# Altium PCB PCB1.PcbDoc
Units mm, origin at the board's own origin, x right, y up, seen from the top; angles counter-clockwise.
Board outline 66.08 x 52.76 mm, 2 copper layers (Top Layer, Bottom Layer); 20 components, 12 nets, 44 pads, 0 vias.
Unrouted connection lines stored in the file: 1.
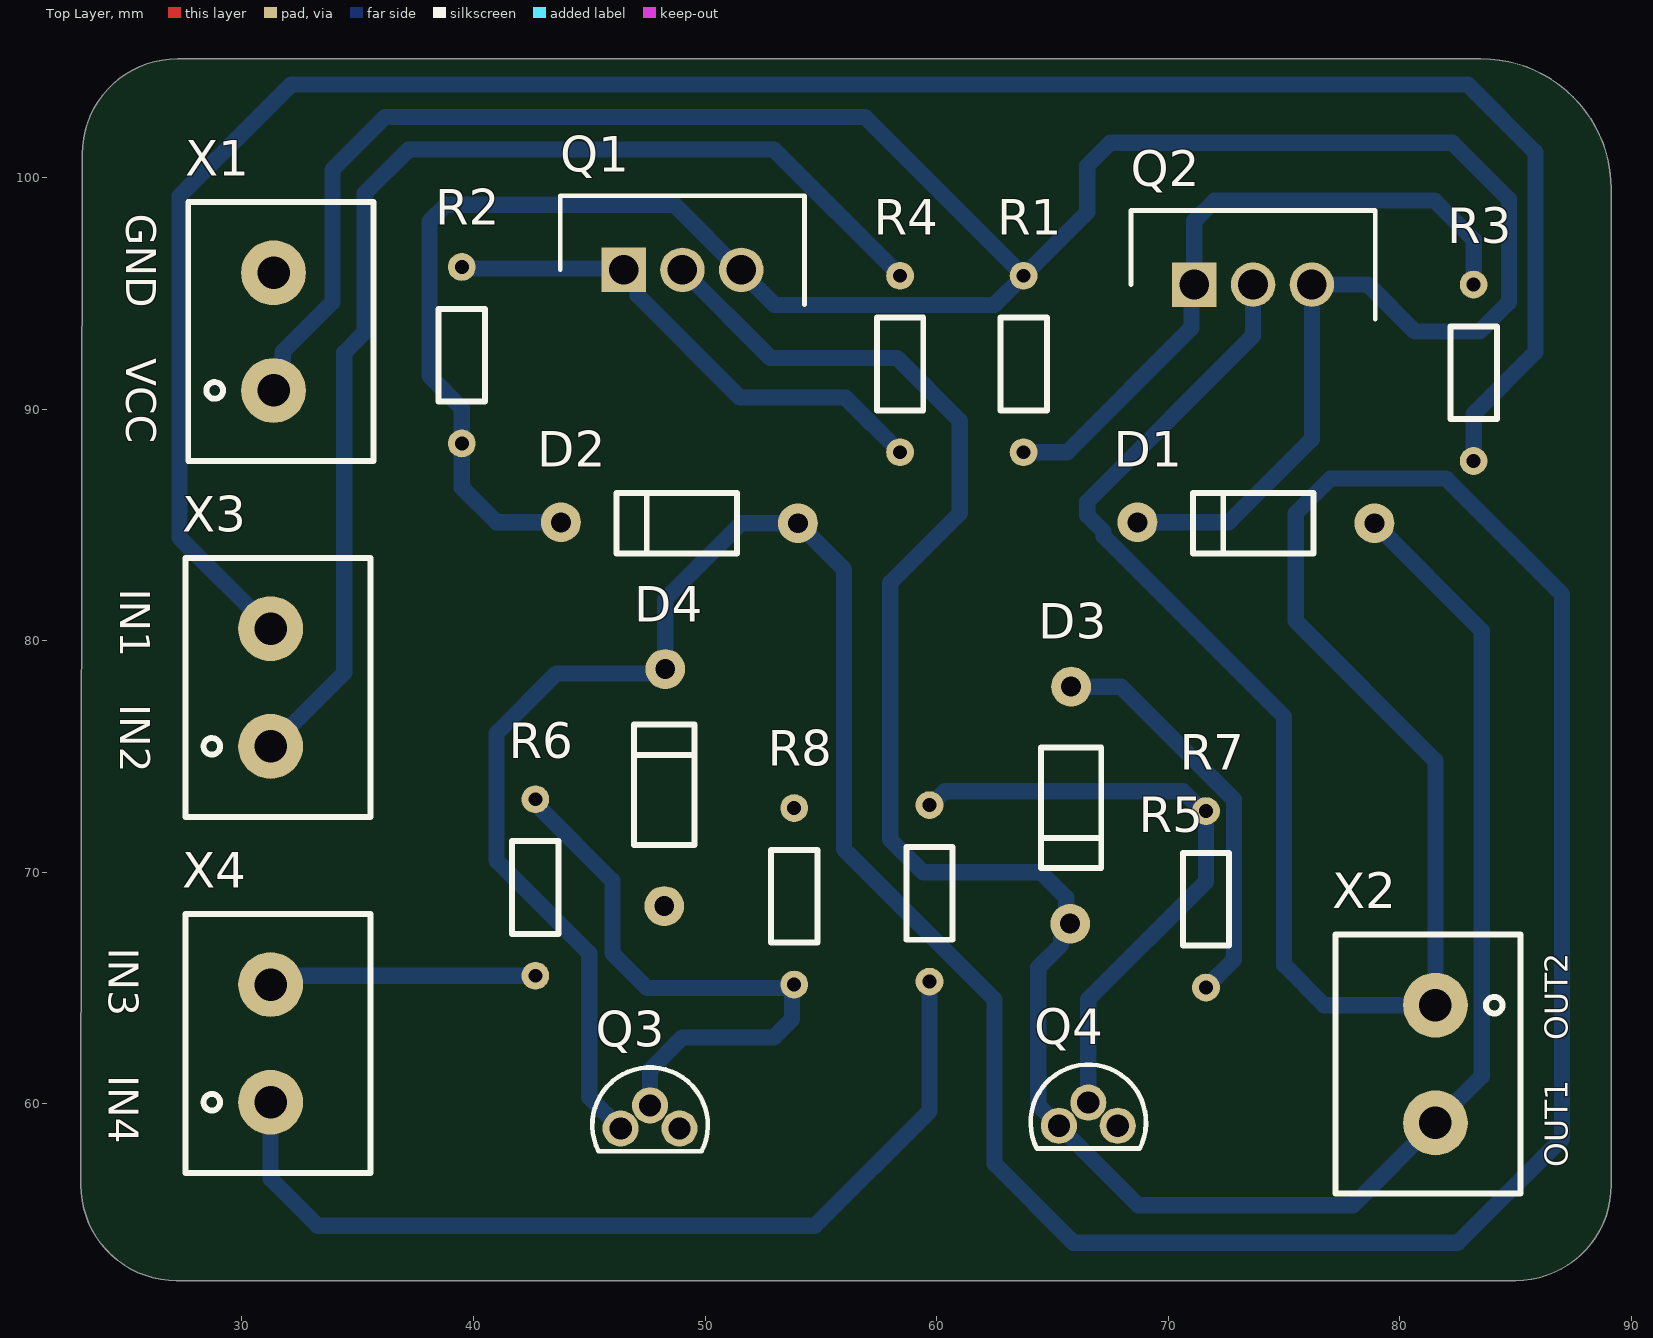
[diagram p0: Top Layer view]
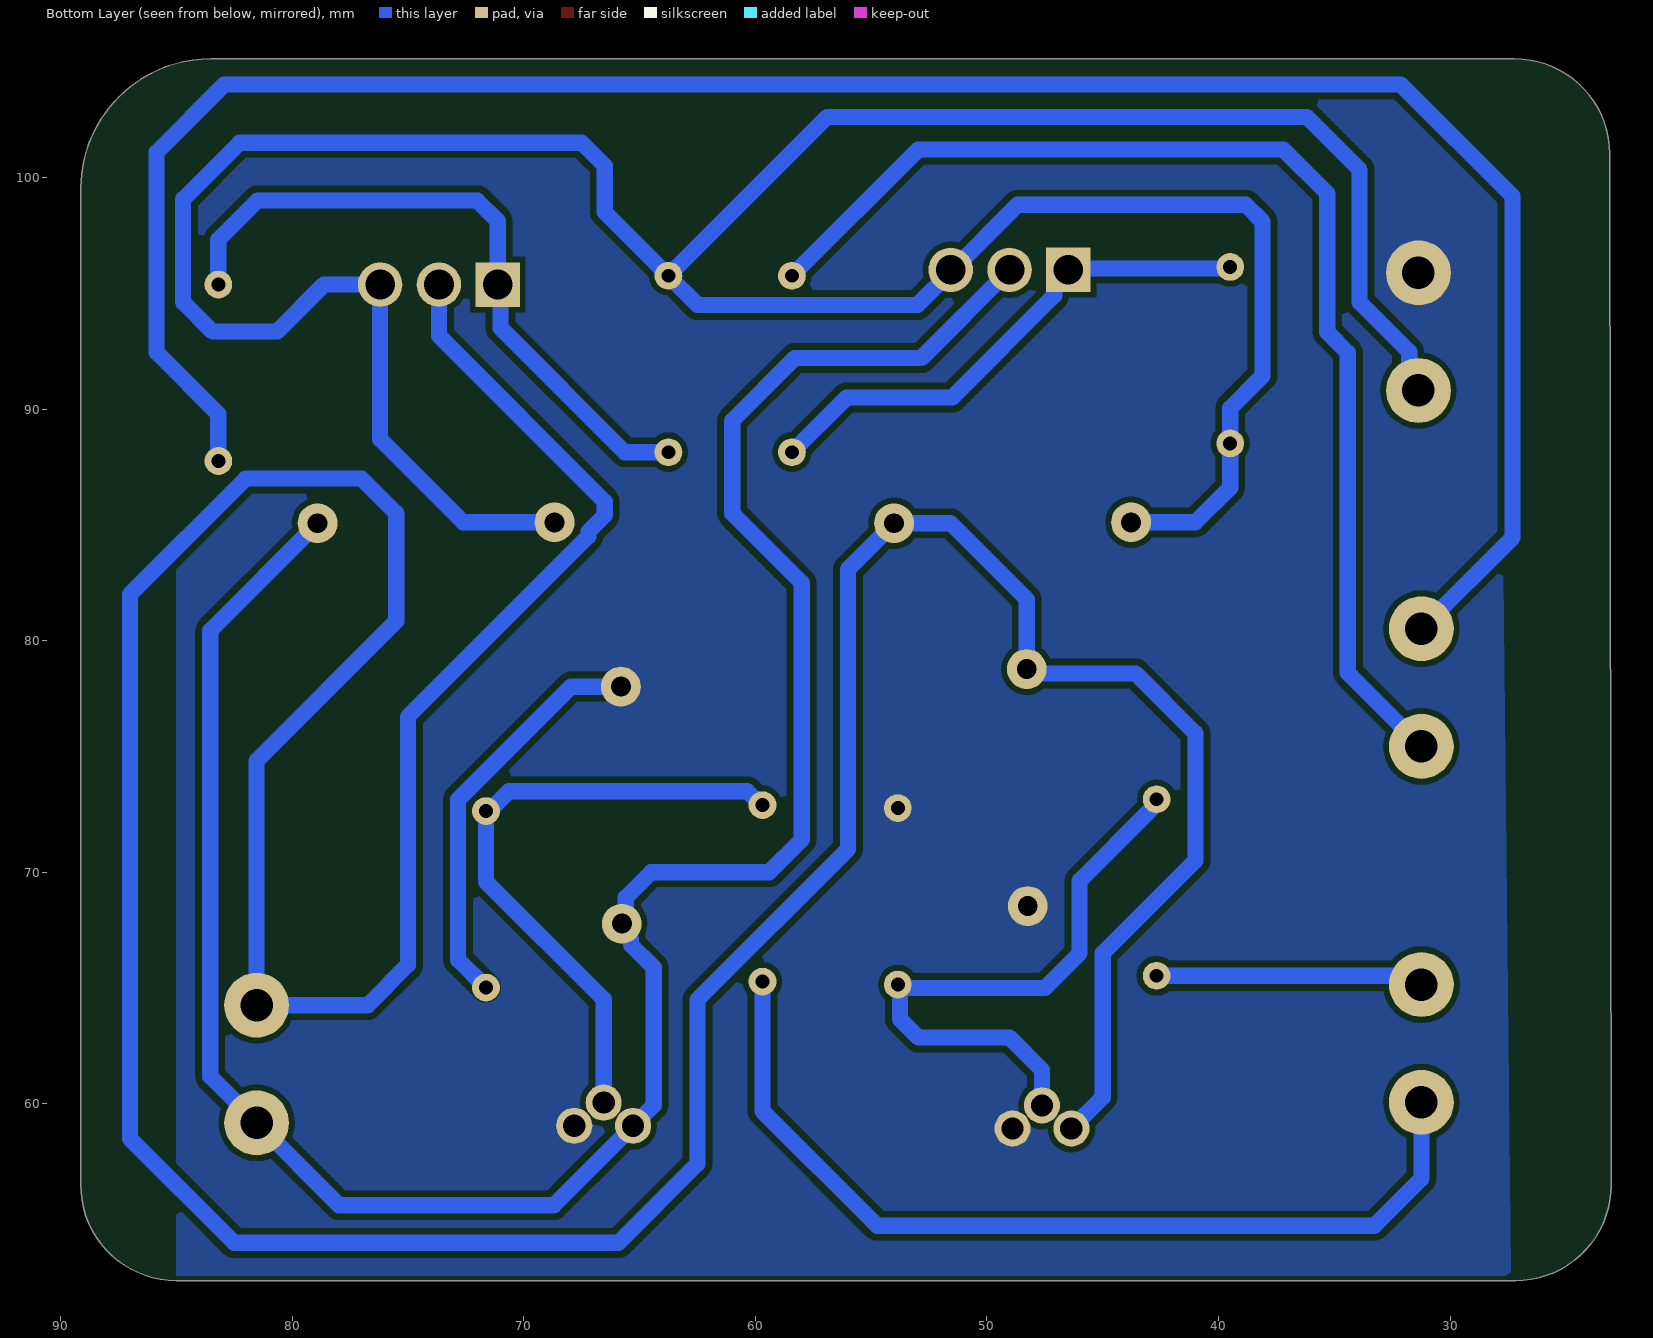
[diagram p1: Bottom Layer view, seen from below]
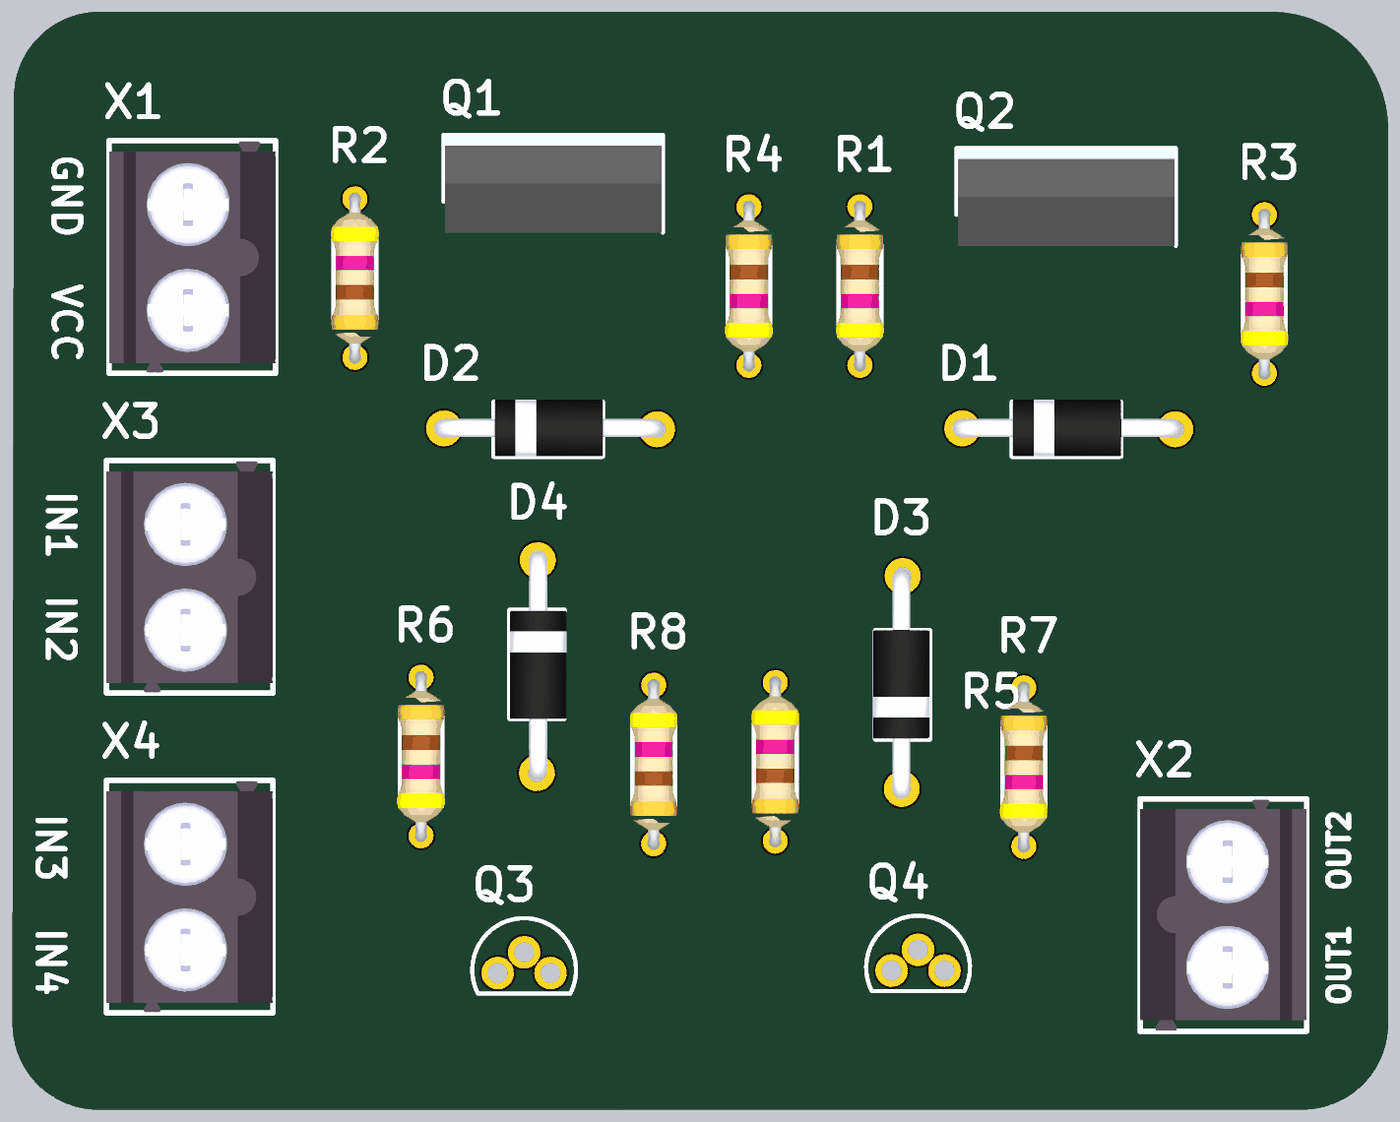
[diagram p2: 3D render of the assembled board from above, using the file's embedded part models]

## Layer stack, top to bottom
Top Solder: solder mask 0.0102, Solder Resist, Dk 3.5
Top Layer: signal copper 0.0356
Dielectric 1: dielectric 0.32, FR-4, Dk 4.8
Bottom Layer: signal copper 0.0356
Bottom Solder: solder mask 0.0102, Solder Resist, Dk 3.5

## Board outline
27.179,52.37 cw(c27.179,56.5) 23.049,56.496 23.043,56.535 23.113,101.014 cw(c27.227,101.013) 27.227,105.127 83.5,105.127 cw(c83.5,99.5) 89.127,99.5 89.127,56.501 89.127,56.5 cw(c85,56.5) 85,52.373 84.997,52.373

## Design rules (kind name [scope] priority, off if disabled: settings)
Clearance [All] p1: gap=0.254 ignorepadtopadclearanceinfootprint=FALSE except(0.3: Track-Track Track-Poly)
PolygonConnect PolygonConnect_1 [All vs IsNamedPolygon('GND_L02_P000')] p1: connectstyle=Direct reliefconductorwidth=0.254 reliefentries=4 polygonreliefangle="90 Angle" airgapwidth=0.254
PolygonConnect [All] p2: connectstyle=Relief reliefconductorwidth=0.254 reliefentries=4 polygonreliefangle="90 Angle" airgapwidth=0.254
RoutingVias [All] p1: holewidth=0.711 width=1.27 viastyle="Through Hole" minholewidth=0.711 minwidth=1.27 maxholewidth=0.711 maxwidth=1.27
SolderMaskExpansion [All] p1: expansion=0.102 istentingtop=FALSE
SupplyNets "Schematic Supply Nets_1" [InNet('VCC')] p1: voltage=0.000
SupplyNets "Schematic Supply Nets" [InNet('GND')] p2: voltage=0.000
Width [All] p1: maxlimit=1 minlimit=0.254 preferedwidth=0.7
30 further rules are at their usual default settings.

## Components (designator, comment, footprint, x,y, rotation, side; value= is the part's Value field where it differs from the comment)
D1 "Diode" "Diode DO_41" 73.787,85.09 r180 top
D2 "Diode" "Diode DO_41" 48.895,85.09 r180 top
D3 "Diode" "Diode DO_41" 65.786,72.898 r270 top
D4 "Diode" "Diode DO_41" 48.26,73.66 r90 top
Q1 "IRF9Z24NPBF" TO254P469X1042X1967-3P 46.482,96.012 r0 top
Q2 "IRF9Z24NPBF" TO254P469X1042X1967-3P 71.12,95.377 r0 top
Q3 "BS170_D26Z" TO-92_FAIRCHILD 47.625,59.436 r0 top
Q4 "BS170_D26Z" TO-92_FAIRCHILD 66.548,59.555 r0 top
R1 "100k" "Resistor THT" 63.754,91.948 r90 top
R2 "100k" "Resistor THT" 39.497,92.329 r270 top
R3 "100R" "Resistor THT" 83.185,91.567 r90 top
R4 "100R" "Resistor THT" 58.42,91.948 r90 top
R5 "100R" "Resistor THT" 59.69,69.088 r270 top
R6 "100R" "Resistor THT" 42.672,69.342 r90 top
R7 "100k" "Resistor THT" 71.628,68.834 r90 top
R8 "100k" "Resistor THT" 53.848,68.961 r270 top
X1 "TERM BLK 2P" "TERM BLK 2P" 31.369,93.345 r90 top
X2 "TERM BLK 2P" "TERM BLK 2P" 81.534,61.722 r270 top
X3 "TERM BLK 2P" "TERM BLK 2P" 31.242,77.978 r90 top
X4 "TERM BLK 2P" "TERM BLK 2P" 31.242,62.611 r90 top

## Footprints (in the part's own frame and the unit in brackets; to place one, negate y for a bottom-side part, rotate by r counter-clockwise, add the part's x,y. Pads: shape width x height; smd on the part's side, far side on the other; paste and mask are expansions set on the pad)
"Diode DO_41" [mm]
  round 1.72 hole 0.86: 8(-5.117,0.021) 9(5.117,-0.021)
  silkscreen extent -2.49,-1.28 2.71,1.32, body extent -5.43,-1.4 5.6,1.32, height 2.72
"Resistor THT" [mm]
  round 1.2 hole 0.6: 1(-3.81,0) 2(3.81,0)
  silkscreen extent -2,-1 2,1, body extent -4.09,-1.14 4.09,1.14, height 2.44
"TERM BLK 2P" [mm] "TERM BLK 2P SIDE ENT 5.08MM PCB"
  round 2.8 hole 1.4: 0(-2.54,0) 1(2.54,0)
  silkscreen extent -5.59,-4.32 5.59,3.68, body extent -5.56,-4.32 5.56,3.68, height 10.5
TO254P469X1042X1967-3P [mm]
  rect 1.92x1.92 hole 1.28: 1(0,0)
  round 1.92 hole 1.28: 2(2.54,0) 3(5.08,0)
  silkscreen extent -2.73,-1.5 7.81,3.19, body extent -2.67,-1.5 7.75,3.19, height 18.84
TO-92_FAIRCHILD [mm]
  round 1.56 hole 0.96: 1(-1.27,-0.5) 2(0,0.5) 3(1.27,-0.5)
  silkscreen extent -2.49,-1.48 2.49,2.14

## Part data
D1 D2 D3 D4: Supplier Part Number=1N4007FSTR-ND, Manifacturer=onsemi, Manifacturer Part  number=1N4007, Supplier=Digi-key
Q1 Q2: "MOSFET (P-Channel)", Manufacturer_Name=Infineon, Mouser Part Number=942-IRF9Z24NPBF, Arrow Part Number=IRF9Z24NPBF, Arrow Price/Stock=https://www.arrow.com/en/products/irf9z24npbf/infineon-technologies-ag?region=europe, Datasheet Link=https://www.infineon.com/dgdl/irf9z24npbf.pdf?fileId=5546d462533600a40153561218961ddb, Height=4.69mm, Manufacturer_Part_Number=IRF9Z24NPBF, Mouser Price/Stock=https://www.mouser.co.uk/ProductDetail/Infineon-Technologies/IRF9Z24NPBF?qs=9%252BKlkBgLFf36xC9PMFW8Lg%3D%3D
Q3 Q4: "MOSFET (N-Channel)", Manufacturer_Name=onsemi, Mouser Part Number=512-BS170D26Z, Arrow Part Number=BS170_D26Z, Arrow Price/Stock=https://www.arrow.com/en/products/bs170-d26z/on-semiconductor?region=nac, Manufacturer_Part_Number=BS170_D26Z, Mouser Price/Stock=http://www.mouser.com/Search/ProductDetail.aspx?qs=38EqnX883HDzR6DEwmZa%2fA%3d%3d
R1 R2 R3 R4 R5 R6 R7 R8: library part "Resistor THT", "1 kOhms ±5% 0.25W, 1/4W Through Hole Resistor Axial Flame Retardant Coating, Safety Carbon Film", Manifacturer Part Number=CF14JT1K00, Supplier Part Number="CF14JT1K00TR-ND - Tape & Reel (TR)", Manifacturer="Stackpole Electronics Inc", Supplier=Degi-key
X1 X2 X3 X4: "TERM BLK 2P SIDE ENT 5.08MM PCB", Manufacturer=Weidmüller, Manufacturer Part Number=1760510000, Supplier Part Number=281-1882-ND, Supplier=Digi-key

## Nets (pads, with @x,y where several pads share a name; then routed paths per layer and width w, separated by ;. In a path a pad name is that pad's centre, name@x,y a point inside that pad or via, vN(x,y) a via of type N, cw(c..) or ccw(c..) an arc to the next point about the centre after c; other vN are vias at no path point)
1: R4.2 X3.0 | length 51.7
  Bottom Layer w0.7: X3.0 34.417,78.613 34.417,92.439 35.306,93.328 35.306,99.314 37.195,101.203 52.975,101.203 R4.2
2: R3.1 X3.1 | length 96.5
  Bottom Layer w0.7: X3.1 27.305,84.455 27.305,99.187 32.131,104.013 82.931,104.013 85.852,101.092 85.852,92.456 83.185,89.789 R3.1
3: R5.2 X4.0 | length 40.2
  Bottom Layer w0.7: X4.0 31.242,56.769 33.274,54.737 54.737,54.737 59.69,59.69 R5.2
4: R6.1 X4.1 | length 11.6
  Bottom Layer w0.7: X4.1 31.623,65.532 R6.1
GND: D3.8 D4.8 Q3.3 Q4.3 R7.1 R8.1 X1.1 | length 17.7
  Bottom Layer w0.7: D3.8 67.96,78.015 72.832,73.143 72.832,66.228 R7.1
NetQ1_1: Q1.1 R2.1 R4.1 | length 22.5
  Bottom Layer w0.7: R2.1 39.56,96.075 46.419,96.075 Q1.1 47.092,95.402 47.092,94.908 51.5,90.5 56.058,90.5 R4.1
NetQ2_1: Q2.1 R1.1 R3.2 | length 29.2
  Bottom Layer w0.7: R1.1 65.638,88.138 71,93.5 71,95.257 Q2.1 71.12,98.12 72,99 81.5,99 83.185,97.315 R3.2
NetQ3_2: Q3.2 R6.2 R8.2 | length 26.7
  Bottom Layer w0.7: R6.2 42.672,73.017 42.922,72.767 42.922,72.711 46,69.633 46,66.5 47.5,65 53.343,65 53.399,65.055 R8.2@53.752,65.055 ; Q3.2 47.625,61.468 49.022,62.865 52.959,62.865 53.752,63.658 R8.2@53.752,65.055 ; R8.2@53.752,65.055 R8.2 R8.2@53.752,65.055
NetQ4_2: Q4.2 R5.1 R7.2 | length 27.2
  Bottom Layer w0.7: R5.1 59.748,72.898 60.35,73.5 70.637,73.5 71.493,72.644 R7.2 71.628,69.596 66.548,64.516 Q4.2
out1: D1.8 D3.9 Q1.2 Q4.1 X2.1 | length 101.3
  Bottom Layer w0.7: Q1.2 49.012,96.012 49,96 49.034,96 52.827,92.207 58.293,92.207 61,89.5 61,85.5 58,82.5 58,71.41 59.41,70 64.5,70 65.591,68.909 65.591,67.955 D3.9 65.765,67.505 65.373,67.112 65.373,66.873 64.389,65.889 64.389,59.944 Q4.1 68.707,55.626 77.978,55.626 X2.1 83.538,61.186 83.538,80.435 D1.8
out2: D2.8 D4.9 Q2.2 Q3.1 X2.0 | length 201.3
  Bottom Layer w0.7: Q3.1 45,60.291 45,66.5 41,70.5 41,76 43.582,78.582 48.086,78.582 D4.9 48.281,81.781 51.569,85.069 D2.8 56,83.081 56,71 62.5,64.5 62.5,57.41 65.91,54 82.5,54 87,58.5 87,82 82,87 77,87 75.5,85.5 75.5,80.851 81.534,74.817 X2.0 76.738,64.262 75,66 75,76.711 67.206,84.504 67.206,84.708 66.5,85.414 66.5,86 73.66,93.16 Q2.2
VCC: D1.9 D2.9 Q1.3 Q2.3 R1.2 R2.2 X1.0 | length 145
  Bottom Layer w0.7: X1.0 31.766,91.202 31.766,92.472 33.909,94.615 33.909,100.33 36.195,102.616 56.896,102.616 R1.2 ; D2.9 41,85.111 39.497,86.614 R2.2 39.497,90.043 38.1,91.44 38.1,98.1 38.822,98.822 48.678,98.822 51.525,95.975 53,94.5 62.496,94.5 R1.2 ; D1.9 72.611,85.111 76.2,88.7 Q2.3 78.623,95.377 80.655,93.345 83.439,93.345 84.709,94.615 84.709,99.06 82.269,101.5 67.5,101.5 66.5,100.5 66.5,98.504 R1.2

## Polygon pours and split planes (outlines as drawn)
GND on Bottom Layer "GND_L02_P000" (solid, remove dead copper, pour order 0): 85,105.015 85,52.578 27.387,52.578 27.943,105.015

## Silkscreen, mask and mechanical layers (free items; w line width, h text height)
Top Overlay:
  text "GND" at 25.019,98.425 h1.3 r270
  text "VCC" at 25.019,92.202 h1.3 r270
  text "IN1" at 24.754,82.246 h1.3 r270
  text "IN2" at 24.754,77.246 h1.3 r270
  text "IN3" at 24.254,66.746 h1.3 r270
  text "OUT2" at 87.246,62.754 h1 r90
  text "IN4" at 24.254,61.246 h1.3 r270
  text "OUT1" at 87.246,57.254 h1 r90
Mechanical 1:
  lines w0.254: 23.17,56.535 23.24,101.013 cw(c27.227,101.013) 27.227,105 31.5,105 44.875,105 68.625,105 82,105 83.5,105 cw(c83.5,99.5) 89,99.5 89,56.5 cw(c85,56.5) 85,52.5 27.179,52.497 cw(c27.179,56.5) 23.176,56.5